# EAGLE board CT_schematic (EAGLE 7.6.0)

Size 100 x 80 mm. Coordinates in mm from the lower left corner, seen from the top.
Outline: 0,0 100,0 100,80 0,80 0,0
Copper layers (1*16): Top 0.035mm / dielectric 1.5mm / Bottom 0.035mm
Design rules "default": minimum track width 10mil, minimum drill 24mil, track to track 8mil, track to pad 8mil, pad to pad 8mil, via to via 8mil, smd to smd 8mil, copper to edge 40mil, drill to drill 8mil, minimum pad ring 10mil, minimum via ring 8mil, stop-mask expansion 4mil, vias tented up to drill 0mil, thermal gap 10mil

## Footprints (pad centres in the part's own frame; a part is rotated, then mirrored left to right if it is on the bottom)
C0603 = smd 0.8 x 0.8: 1 -0.762,0; 2 0.762,0
C0402 = smd 0.5 x 0.5: 1 -0.508,0; 2 0.508,0
C0805 = smd 1.2 x 1.3: 1 -1.016,0; 2 1.016,0
C1210 = smd 1.2 x 2.5: 1 -1.524,0; 2 1.524,0
2220 = smd 1.85 x 5.5: 1 -2.55,0; 2 2.55,0
R0603 = smd 0.8 x 0.8: 1 -0.762,0; 2 0.762,0
EXV-9H = smd 3.505 x 1.676: 1 -2.857,0; 2 2.857,0
L0603 = smd 0.8 x 0.8: 1 -0.762,0; 2 0.762,0
DR1040 = smd 1.6 x 3.2: 1 -4.458,0; 2 4.458,0
PJ-037B_PACKAGE = drill 3.7 square: 1 12,0 | drill 3.2 square: 2 6,0
TFBGA216 = smd 0.4 x 0.4: A1 -5.6,5.6; A2 -4.8,5.6; A3 -4,5.6; A4 -3.2,5.6; A5 -2.4,5.6; A6 -1.6,5.6; A7 -0.8,5.6; A8 0,5.6; A9 0.8,5.6; A10 1.6,5.6; A11 2.4,5.6; A12 3.2,5.6; A13 4,5.6; A14 4.8,5.6; A15 5.6,5.6; B1 -5.6,4.8; B2 -4.8,4.8; B3 -4,4.8; B4 -3.2,4.8; B5 -2.4,4.8; B6 -1.6,4.8; B7 -0.8,4.8; B8 0,4.8; B9 0.8,4.8; B10 1.6,4.8; B11 2.4,4.8; B12 3.2,4.8; B13 4,4.8; B14 4.8,4.8; B15 5.6,4.8; C1 -5.6,4; C2 -4.8,4; C3 -4,4; C4 -3.2,4; C5 -2.4,4; C6 -1.6,4; C7 -0.8,4; C8 0,4; C9 0.8,4; C10 1.6,4; C11 2.4,4; C12 3.2,4; C13 4,4; C14 4.8,4; C15 5.6,4; D1 -5.6,3.2; D2 -4.8,3.2; D3 -4,3.2; D4 -3.2,3.2; D5 -2.4,3.2; D6 -1.6,3.2; D7 -0.8,3.2; D8 0,3.2; D9 0.8,3.2; D10 1.6,3.2; D11 2.4,3.2; D12 3.2,3.2; D13 4,3.2; D14 4.8,3.2; D15 5.6,3.2; E1 -5.6,2.4; E2 -4.8,2.4; E3 -4,2.4; E4 -3.2,2.4; E5 -2.4,2.4; E6 -1.6,2.4; E7 -0.8,2.4; E8 0,2.4; E9 0.8,2.4; E10 1.6,2.4; E11 2.4,2.4; E12 3.2,2.4; E13 4,2.4; E14 4.8,2.4; E15 5.6,2.4; F1 -5.6,1.6; F2 -4.8,1.6; F3 -4,1.6; F4 -3.2,1.6; F5 -2.4,1.6; F6 -1.6,1.6; F7 -0.8,1.6; F8 0,1.6; F9 0.8,1.6; F10 1.6,1.6; F11 2.4,1.6; F12 3.2,1.6; F13 4,1.6; F14 4.8,1.6; F15 5.6,1.6; G1 -5.6,0.8; G2 -4.8,0.8; G3 -4,0.8; G4 -3.2,0.8; G5 -2.4,0.8; G6 -1.6,0.8; G10 1.6,0.8; G11 2.4,0.8; G12 3.2,0.8; G13 4,0.8; G14 4.8,0.8; G15 5.6,0.8; H1 -5.6,0; H2 -4.8,0; H3 -4,0; H4 -3.2,0; H5 -2.4,0; H6 -1.6,0; H10 1.6,0; H11 2.4,0; H12 3.2,0; H13 4,0; H14 4.8,0; H15 5.6,0; J1 -5.6,-0.8; J2 -4.8,-0.8; J3 -4,-0.8; J4 -3.2,-0.8; J5 -2.4,-0.8; J6 -1.6,-0.8; J10 1.6,-0.8; J11 2.4,-0.8; J12 3.2,-0.8; J13 4,-0.8; J14 4.8,-0.8; J15 5.6,-0.8; K1 -5.6,-1.6; K2 -4.8,-1.6; K3 -4,-1.6; K4 -3.2,-1.6; K5 -2.4,-1.6; K6 -1.6,-1.6; K7 -0.8,-1.6; K8 0,-1.6; K9 0.8,-1.6; K10 1.6,-1.6; K11 2.4,-1.6; K12 3.2,-1.6; K13 4,-1.6; K14 4.8,-1.6; K15 5.6,-1.6; L1 -5.6,-2.4; L2 -4.8,-2.4; L3 -4,-2.4; L4 -3.2,-2.4; L5 -2.4,-2.4; L6 -1.6,-2.4; L7 -0.8,-2.4; L8 0,-2.4; L9 0.8,-2.4; L10 1.6,-2.4; L11 2.4,-2.4; L12 3.2,-2.4; L13 4,-2.4; L14 4.8,-2.4; L15 5.6,-2.4; M1 -5.6,-3.2; M2 -4.8,-3.2; M3 -4,-3.2; M4 -3.2,-3.2; M5 -2.4,-3.2; M6 -1.6,-3.2; M7 -0.8,-3.2; M8 0,-3.2; M9 0.8,-3.2; M10 1.6,-3.2; M11 2.4,-3.2; M12 3.2,-3.2; M13 4,-3.2; M14 4.8,-3.2; M15 5.6,-3.2; N1 -5.6,-4; N2 -4.8,-4; N3 -4,-4; N4 -3.2,-4; N5 -2.4,-4; N6 -1.6,-4; N7 -0.8,-4; N8 0,-4; N9 0.8,-4; N10 1.6,-4; N11 2.4,-4; N12 3.2,-4; N13 4,-4; N14 4.8,-4; N15 5.6,-4; P1 -5.6,-4.8; P2 -4.8,-4.8; P3 -4,-4.8; P4 -3.2,-4.8; P5 -2.4,-4.8; P6 -1.6,-4.8; P7 -0.8,-4.8; P8 0,-4.8; P9 0.8,-4.8; P10 1.6,-4.8; P11 2.4,-4.8; P12 3.2,-4.8; P13 4,-4.8; P14 4.8,-4.8; P15 5.6,-4.8; R1 -5.6,-5.6; R2 -4.8,-5.6; R3 -4,-5.6; R4 -3.2,-5.6; R5 -2.4,-5.6; R6 -1.6,-5.6; R7 -0.8,-5.6; R8 0,-5.6; R9 0.8,-5.6; R10 1.6,-5.6; R11 2.4,-5.6; R12 3.2,-5.6; R13 4,-5.6; R14 4.8,-5.6; R15 5.6,-5.6
SOIC-8 = smd 1.6 x 0.6: 1 -2.7,1.905 | smd 1.55 x 0.6: 2 -2.7,0.635; 3 -2.7,-0.635; 4 -2.7,-1.905; 5 2.7,-1.905; 6 2.7,-0.635; 7 2.7,0.635; 8 2.7,1.905
SAMTEC_FTSH-105-01-L-DV-K = smd 0.762 x 2.794: 1 -2.54,-2.032; 2 -2.54,2.032; 3 -1.27,-2.032; 4 -1.27,2.032; 5 0,-2.032; 6 0,2.032; 7 1.27,-2.032; 8 1.27,2.032; 9 2.54,-2.032; 10 2.54,2.032
LH430WV2-SD01 = smd 0.23 x 0.7: 1 0,0; 2 -0.4,0; 3 -0.8,0; 4 -1.2,0; 5 -1.6,0; 6 -2,0; 7 -2.4,0; 8 -2.8,0; 9 -3.2,0; 10 -3.6,0; 11 -4,0; 12 -4.4,0; 13 -4.8,0; 14 -5.2,0; 15 -5.6,0; 16 -5.6,-2.15; 17 -5.2,-2.15; 18 -4.8,-2.15; 19 -4.4,-2.15; 20 -4,-2.15; 21 -3.6,-2.15; 22 -3.2,-2.15; 23 -2.8,-2.15; 24 -2.4,-2.15; 25 -2,-2.15; 26 -1.6,-2.15; 27 -1.2,-2.15; 28 -0.8,-2.15; 29 -0.4,-2.15; 30 0,-2.15
TFBGA-153 = smd 0.3 x 0.3: A1 -3.25,3.25; A2 -2.75,3.25; A3 -2.25,3.25; A4 -1.75,3.25; A5 -1.25,3.25; A6 -0.75,3.25; A7 -0.25,3.25; A8 0.25,3.25; A9 0.75,3.25; A10 1.25,3.25; A11 1.75,3.25; A12 2.25,3.25; A13 2.75,3.25; A14 3.25,3.25; B1 -3.25,2.75; B2 -2.75,2.75; B3 -2.25,2.75; B4 -1.75,2.75; B5 -1.25,2.75; B6 -0.75,2.75; B7 -0.25,2.75; B8 0.25,2.75; B9 0.75,2.75; B10 1.25,2.75; B11 1.75,2.75; B12 2.25,2.75; B13 2.75,2.75; B14 3.25,2.75; C1 -3.25,2.25; C2 -2.75,2.25; C3 -2.25,2.25; C4 -1.75,2.25; C5 -1.25,2.25; C6 -0.75,2.25; C7 -0.25,2.25; C8 0.25,2.25; C9 0.75,2.25; C10 1.25,2.25; C11 1.75,2.25; C12 2.25,2.25; C13 2.75,2.25; C14 3.25,2.25; D1 -3.25,1.75; D2 -2.75,1.75; D3 -2.25,1.75; D4 -1.75,1.75; D12 2.25,1.75; D13 2.75,1.75; D14 3.25,1.75; E1 -3.25,1.25; E2 -2.75,1.25; E3 -2.25,1.25; E5 -1.25,1.25; E6 -0.75,1.25; E7 -0.25,1.25; E8 0.25,1.25; E9 0.75,1.25; E10 1.25,1.25; E12 2.25,1.25; E13 2.75,1.25; E14 3.25,1.25; F1 -3.25,0.75; F2 -2.75,0.75; F3 -2.25,0.75; F5 -1.25,0.75; F10 1.25,0.75; F12 2.25,0.75; F13 2.75,0.75; F14 3.25,0.75; G1 -3.25,0.25; G2 -2.75,0.25; G3 -2.25,0.25; G5 -1.25,0.25; G10 1.25,0.25; G12 2.25,0.25; G13 2.75,0.25; G14 3.25,0.25; H1 -3.25,-0.25; H2 -2.75,-0.25; H3 -2.25,-0.25; H5 -1.25,-0.25; H10 1.25,-0.25; H12 2.25,-0.25; H13 2.75,-0.25; H14 3.25,-0.25; J1 -3.25,-0.75; J2 -2.75,-0.75; J3 -2.25,-0.75; J5 -1.25,-0.75; J10 1.25,-0.75; J12 2.25,-0.75; J13 2.75,-0.75; J14 3.25,-0.75; K1 -3.25,-1.25; K2 -2.75,-1.25; K3 -2.25,-1.25; K5 -1.25,-1.25; K6 -0.75,-1.25; K7 -0.25,-1.25; K8 0.25,-1.25; K9 0.75,-1.25; K10 1.25,-1.25; K12 2.25,-1.25; K13 2.75,-1.25; K14 3.25,-1.25; L1 -3.25,-1.75; L2 -2.75,-1.75; L3 -2.25,-1.75; L12 2.25,-1.75; L13 2.75,-1.75; L14 3.25,-1.75; M1 -3.25,-2.25; M2 -2.75,-2.25; M3 -2.25,-2.25; M4 -1.75,-2.25; M5 -1.25,-2.25; M6 -0.75,-2.25; M7 -0.25,-2.25; M8 0.25,-2.25; M9 0.75,-2.25; M10 1.25,-2.25; M11 1.75,-2.25; M12 2.25,-2.25; M13 2.75,-2.25; M14 3.25,-2.25; N1 -3.25,-2.75; N2 -2.75,-2.75; N3 -2.25,-2.75; N4 -1.75,-2.75; N5 -1.25,-2.75; N6 -0.75,-2.75; N7 -0.25,-2.75; N8 0.25,-2.75; N9 0.75,-2.75; N10 1.25,-2.75; N11 1.75,-2.75; N12 2.25,-2.75; N13 2.75,-2.75; N14 3.25,-2.75; P1 -3.25,-3.25; P2 -2.75,-3.25; P3 -2.25,-3.25; P4 -1.75,-3.25; P5 -1.25,-3.25; P6 -0.75,-3.25; P7 -0.25,-3.25; P8 0.25,-3.25; P9 0.75,-3.25; P10 1.25,-3.25; P11 1.75,-3.25; P12 2.25,-3.25; P13 2.75,-3.25; P14 3.25,-3.25
TH58NVG3S0HBAI4 = smd 0.46 x 0.46: A1 -5.6,2.4; A2 -5.6,1.6; A9 -5.6,-5.6; A10 -5.6,-6.4; B1 -4.8,2.4; B9 -4.8,-5.6; B10 -4.8,-6.4; C3 -4,0.8; C4 -3.2,0.8; C5 -2.4,0.8; C6 -1.6,0.8; C7 -0.8,0.8; C8 0,0.8; D3 -4,0; D4 -3.2,0; D5 -2.4,0; D6 -1.6,0; D7 -0.8,0; D8 0,0; E3 -4,-0.8; E4 -3.2,-0.8; E5 -2.4,-0.8; E6 -1.6,-0.8; E7 -0.8,-0.8; E8 0,-0.8; F3 -4,-1.6; F4 -3.2,-1.6; F5 -2.4,-1.6; F6 -1.6,-1.6; F7 -0.8,-1.6; F8 0,-1.6; G3 -4,-2.4; G4 -3.2,-2.4; G5 -2.4,-2.4; G6 -1.6,-2.4; G7 -0.8,-2.4; G8 0,-2.4; H3 -4,-3.2; H4 -3.2,-3.2; H5 -2.4,-3.2; H6 -1.6,-3.2; H7 -0.8,-3.2; H8 0,-3.2; J3 -4,-4; J4 -3.2,-4; J5 -2.4,-4; J6 -1.6,-4; J7 -0.8,-4; J8 0,-4; K3 -4,-4.8; K4 -3.2,-4.8; K5 -2.4,-4.8; K6 -1.6,-4.8; K7 -0.8,-4.8; K8 0,-4.8; L1 0.8,2.4; L2 0.8,1.6; L9 0.8,-5.6; L10 0.8,-6.4; M1 1.6,2.4; M2 1.6,1.6; M9 1.6,-5.6; M10 1.6,-6.4
ASEK = smd 1.4 x 1: 1 -1.1,-0.8; 2 1.1,-0.8; 3 1.1,0.8; 4 -1.1,0.8
ASFL1 = smd 1.7 x 1.5: 1 -1.27,-1.1; 2 1.27,-1.1; 3 1.27,1.1; 4 -1.27,1.1
SOIC-8_EP = smd 1.6 x 0.533: 1 -2.921,1.905; 2 -2.921,0.635; 3 -2.921,-0.635; 4 -2.921,-1.905; 5 2.921,-1.905; 6 2.921,-0.635; 7 2.921,0.635; 8 2.921,1.905 | smd 2.54 x 3.302: EPAD 0,0 | drill 0.406 pad 0.406: P$1 -0.508,0.635; P$2 0.381,0.635; P$3 -0.508,-0.635; P$4 0.381,-0.635
WSON-8 = smd 0.3 x 0.6: 1 -0.75,0; 2 0.05,0; 3 0.85,0; 4 1.65,0; 5 1.65,3.8; 6 0.85,3.8; 7 0.05,3.8; 8 -0.75,3.8 | smd 3 x 2.6: PAD 0.45,1.9
QFN-16_EP = smd 0.805 x 0.3: 1 -1.452,0.75; 2 -1.452,0.25; 3 -1.452,-0.25; 4 -1.452,-0.75; 9 1.452,-0.75; 10 1.452,-0.25; 11 1.452,0.25; 12 1.452,0.75 | smd 0.3 x 0.805: 5 -0.75,-1.452; 6 -0.25,-1.452; 7 0.25,-1.452; 8 0.75,-1.452; 13 0.75,1.452; 14 0.25,1.452; 15 -0.25,1.452; 16 -0.75,1.452 | smd 1.55 x 1.55: 17 0,0
SON-6 = smd 0.55 x 0.3: 1 -0.355,0.5 | smd 0.52 x 0.3: 2 -0.37,0; 3 -0.37,-0.5; 4 0.37,-0.5; 5 0.37,0; 6 0.37,0.5
SW_4-1437565-2 = smd 1.4 x 2.1: 1 -2.23,4.55; 2 -2.23,-4.55; 3 2.23,4.55; 4 2.23,-4.55
LGM67K-G1J2-24-Z = smd 0.8 x 1.4: A -2,0; C 0,0
NC7SZ125M5X = smd 1.3 x 0.7: 1 -1.3,0.95; 2 -1.3,0; 3 -1.3,-0.95; 4 1.3,-0.95; 5 1.3,0.95

## Placement (x,y rotation side)
C1  1e-06  [C0603]  -22.86,76.2 0 top  (outside the outline)
C2  1e-07  [C0603]  -26.67,76.2 0 top  (outside the outline)
C3  1e-07  [C0603]  -30.48,76.2 0 top  (outside the outline)
C4  1e-07  [C0603]  -34.29,76.2 0 top  (outside the outline)
C5  1e-07  [C0603]  -38.1,76.2 0 top  (outside the outline)
C6  1e-07  [C0603]  -41.91,76.2 0 top  (outside the outline)
C7  1e-07  [C0603]  -45.72,76.2 0 top  (outside the outline)
C8  1e-07  [C0603]  -49.53,76.2 0 top  (outside the outline)
C9  1e-07  [C0603]  -53.34,76.2 0 top  (outside the outline)
C10  1e-07  [C0603]  -57.15,76.2 0 top  (outside the outline)
C11  1e-07  [C0603]  -60.96,76.2 0 top  (outside the outline)
C12  1e-07  [C0603]  -64.77,76.2 0 top  (outside the outline)
C13  1e-07  [C0603]  -68.58,76.2 0 top  (outside the outline)
C14  1e-07  [C0603]  -72.39,76.2 0 top  (outside the outline)
C15  1e-07  [C0603]  -76.2,76.2 0 top  (outside the outline)
C16  1e-07  [C0603]  -80.01,76.2 0 top  (outside the outline)
C17  1e-07  [C0603]  -83.82,76.2 0 top  (outside the outline)
C18  1e-07  [C0603]  -15.24,81.28 0 top  (outside the outline)
C19  1e-07  [C0603]  -19.05,81.28 0 top  (outside the outline)
C20  1e-07  [C0603]  -22.86,81.28 0 top  (outside the outline)
C21  1e-07  [C0603]  -26.67,81.28 0 top  (outside the outline)
C22  4.7e-06  [C0603]  -69.85,71.12 0 top  (outside the outline)
C23  1e-07  [C0603]  -30.48,81.28 0 top  (outside the outline)
C24  1e-08  [C0603]  -34.29,81.28 0 top  (outside the outline)
C25  1e-06  [C0603]  -38.1,81.28 0 top  (outside the outline)
C26  1e-07  [C0603]  -41.91,81.28 0 top  (outside the outline)
C27  2.2e-06  [C0603]  -73.66,71.12 0 top  (outside the outline)
C28  2.2e-06  [C0603]  -77.47,71.12 0 top  (outside the outline)
C29  2.2e-06  [C0603]  -81.28,71.12 0 top  (outside the outline)
C30  1e-08  [C0402]  -46.99,86.36 0 top  (outside the outline)
C31  1e-07  [C0402]  -50.8,86.36 0 top  (outside the outline)
C32  1e-07  [C0402]  -54.61,86.36 0 top  (outside the outline)
C33  1e-07  [C0402]  -58.42,86.36 0 top  (outside the outline)
C34  1e-07  [C0402]  -62.23,86.36 0 top  (outside the outline)
C35  1e-07  [C0402]  -66.04,86.36 0 top  (outside the outline)
C36  1e-07  [C0402]  -69.85,86.36 0 top  (outside the outline)
C37  1e-07  [C0402]  -73.66,86.36 0 top  (outside the outline)
C38  2.2e-06  [C0603]  -85.09,71.12 0 top  (outside the outline)
C39  2.2e-06  [C0603]  -15.24,76.2 0 top  (outside the outline)
C40  1e-07  [C0402]  -77.47,86.36 0 top  (outside the outline)
C41  1e-07  [C0402]  -81.28,86.36 0 top  (outside the outline)
C42  2.2e-06  [C0603]  -19.05,76.2 0 top  (outside the outline)
C43  1e-05  [C0805]  -21.59,60.96 0 top  (outside the outline)
C44  1e-07  [C0402]  -85.09,86.36 0 top  (outside the outline)
C45  1e-07  [C0402]  -15.24,91.44 0 top  (outside the outline)
C46  1e-08  [C0402]  -19.05,91.44 0 top  (outside the outline)
C47  1e-08  [C0402]  -22.86,91.44 0 top  (outside the outline)
C48  1e-05  [C1210]  -29.21,54.61 0 top  (outside the outline)
C49  1e-05  [C1210]  -35.56,54.61 0 top  (outside the outline)
C50  1e-05  [C1210]  -41.91,54.61 0 top  (outside the outline)
C51  1e-05  [C1210]  -48.26,54.61 0 top  (outside the outline)
C52  1e-08  [C0402]  -26.67,91.44 0 top  (outside the outline)
C53  1e-05  [C1210]  -54.61,54.61 0 top  (outside the outline)
C54  1e-05  [C1210]  -60.96,54.61 0 top  (outside the outline)
C55  1e-05  [C0805]  -26.67,60.96 0 top  (outside the outline)
C56  1e-06  [C0603]  -45.72,81.28 0 top  (outside the outline)
C57  1e-07  [C0402]  -30.48,91.44 0 top  (outside the outline)
C58  6.8e-05  [2220]  -33.02,36.83 0 top  (outside the outline)
C59  8e-07  [R0603]  -49.53,81.28 0 top  (outside the outline)
C60  8e-06  [R0603]  -53.34,81.28 0 top  (outside the outline)
C61  1e-07  [C0402]  -34.29,91.44 0 top  (outside the outline)
C62  0.0001  [EXV-9H]  -55.88,45.72 0 top  (outside the outline)
C63  0.0001  [EXV-9H]  -67.31,45.72 0 top  (outside the outline)
C64  1e-08  [C0402]  -38.1,91.44 0 top  (outside the outline)
C65  1e-08  [C0402]  -41.91,91.44 0 top  (outside the outline)
C66  1e-08  [C0402]  -45.72,91.44 0 top  (outside the outline)
C67  1e-08  [C0402]  -49.53,91.44 0 top  (outside the outline)
F1  240.0  [L0603]  -57.15,81.28 0 top  (outside the outline)
I1  5.2e-06  [DR1040]  -72.39,22.86 0 top  (outside the outline)
J1  PJ-037B  [PJ-037B_PACKAGE]  -45.72,25.4 0 top  (outside the outline)
R2  1000.0  [R0603]  -60.96,81.28 0 top  (outside the outline)
R7  4700.0  [R0603]  -64.77,81.28 0 top  (outside the outline)
R8  4700.0  [R0603]  -68.58,81.28 0 top  (outside the outline)
R9  4700.0  [R0603]  -72.39,81.28 0 top  (outside the outline)
R10  2200.0  [R0603]  -76.2,81.28 0 top  (outside the outline)
R11  10000.0  [R0603]  -67.31,60.96 0 top  (outside the outline)
R12  10000.0  [R0603]  -72.39,60.96 0 top  (outside the outline)
R13  10000.0  [R0603]  -77.47,60.96 0 top  (outside the outline)
R14  10000.0  [R0603]  -82.55,60.96 0 top  (outside the outline)
R15  10000.0  [R0603]  -15.24,66.04 0 top  (outside the outline)
R16  10000.0  [R0603]  -20.32,66.04 0 top  (outside the outline)
R17  10000.0  [R0603]  -25.4,66.04 0 top  (outside the outline)
R18  10000.0  [R0603]  -30.48,66.04 0 top  (outside the outline)
R19  10000.0  [R0603]  -35.56,66.04 0 top  (outside the outline)
R20  5.0  [R0603]  -80.01,81.28 0 top  (outside the outline)
R21  10000.0  [R0603]  -40.64,66.04 0 top  (outside the outline)
R22  34000.0  [R0603]  -45.72,66.04 0 top  (outside the outline)
R23  34000.0  [R0603]  -50.8,66.04 0 top  (outside the outline)
R24  34000.0  [R0603]  -55.88,66.04 0 top  (outside the outline)
R25  34000.0  [R0603]  -60.96,66.04 0 top  (outside the outline)
R26  34000.0  [R0603]  -66.04,66.04 0 top  (outside the outline)
R27  34000.0  [R0603]  -71.12,66.04 0 top  (outside the outline)
R28  34000.0  [R0603]  -76.2,66.04 0 top  (outside the outline)
R29  34000.0  [R0603]  -81.28,66.04 0 top  (outside the outline)
R30  34000.0  [R0603]  -15.24,71.12 0 top  (outside the outline)
R31  34000.0  [R0603]  -20.32,71.12 0 top  (outside the outline)
R32  10000.0  [R0603]  -25.4,71.12 0 top  (outside the outline)
R33  10000.0  [R0603]  -30.48,71.12 0 top  (outside the outline)
R34  10000.0  [R0603]  -35.56,71.12 0 top  (outside the outline)
R35  10000.0  [R0603]  -40.64,71.12 0 top  (outside the outline)
R36  10000.0  [R0603]  -45.72,71.12 0 top  (outside the outline)
R37  910.0  [R0603]  -83.82,81.28 0 top  (outside the outline)
R38  2200.0  [R0603]  -15.24,86.36 0 top  (outside the outline)
R39  100000.0  [R0603]  -36.83,60.96 0 top  (outside the outline)
R40  1800.0  [R0603]  -19.05,86.36 0 top  (outside the outline)
R41  1000.0  [R0603]  -22.86,86.36 0 top  (outside the outline)
R42  20000.0  [R0603]  -50.8,71.12 0 top  (outside the outline)
R43  91000.0  [R0603]  -55.88,71.12 0 top  (outside the outline)
R44  300000.0  [R0603]  -41.91,60.96 0 top  (outside the outline)
R45  100000.0  [R0603]  -46.99,60.96 0 top  (outside the outline)
R46  842943.08  [R0603]  -31.75,60.96 0 top  (outside the outline)
R47  100000.0  [R0603]  -52.07,60.96 0 top  (outside the outline)
R48  10000.0  [R0603]  -60.96,71.12 0 top  (outside the outline)
R49  10000.0  [R0603]  -66.04,71.12 0 top  (outside the outline)
R50  9100.0  [R0603]  -26.67,86.36 0 top  (outside the outline)
R51  680000.0  [R0603]  -57.15,60.96 0 top  (outside the outline)
R52  120000.0  [R0603]  -62.23,60.96 0 top  (outside the outline)
U1  STM32F769NGH6  [TFBGA216]  -39.37,8.89 0 top  (outside the outline)
U2  AT25M02-SSHD-T  [SOIC-8]  -24.13,36.83 0 top  (outside the outline)
U3  FTSH-105-01-L-DV-K  [SAMTEC_FTSH-105-01-L-DV-K]  -68.58,7.62 0 top  (outside the outline)
U4  LH430WV2-SD01  [LH430WV2-SD01]  -30.48,87.63 0 top  (outside the outline)
U5  mtfc4gmcdm  [TFBGA-153]  -20.32,8.89 0 top  (outside the outline)
U6  TH58NVG3S0HBAI4  [TH58NVG3S0HBAI4]  -24.13,26.67 0 top  (outside the outline)
U7  ASEK-32.768KHz-ECST  [ASEK]  -46.99,45.72 0 top  (outside the outline)
U8  ASFL1-25MHZ-NCS  [ASFL1]  -26.67,46.99 0 top  (outside the outline)
U9  MIC5234YME  [SOIC-8_EP]  -77.47,44.45 0 top  (outside the outline)
U10  LP3878SDX-ADJ/NOPB  [WSON-8]  -54.61,35.56 0 top  (outside the outline)
U11  LTC3601EUD#PBF  [QFN-16_EP]  -40.64,86.36 0 top  (outside the outline)
U12  LP2951ACSDX/NOPB  [WSON-8]  -72.39,35.56 0 top  (outside the outline)
U13  TPS3895ADRYR  [SON-6]  -52.07,90.17 0 top  (outside the outline)
U14  4-1437565-2  [SW_4-1437565-2]  -62.23,24.13 0 top  (outside the outline)
U15  Q65110A2395  [LGM67K-G1J2-24-Z]  -17.78,54.61 0 top  (outside the outline)
U16  nc7sz125m5x  [NC7SZ125M5X]  -66.04,53.34 0 top  (outside the outline)
U17  nc7sz125m5x  [NC7SZ125M5X]  -72.39,53.34 0 top  (outside the outline)
U18  nc7sz125m5x  [NC7SZ125M5X]  -78.74,53.34 0 top  (outside the outline)
U19  nc7sz125m5x  [NC7SZ125M5X]  -15.24,59.69 0 top  (outside the outline)

## Library data of the parts
C1-C67 F1 I1 J1 R2 R7-R52 U1-U19 = circuit_tree

## Nets
CLK_U1_E1: U1.E1 U7.3
CLK_U1_G1: U1.G1 U8.3
GND: C1.2 C2.2 C3.2 C4.2 C5.2 C6.2 C7.2 C8.2 C9.2 C10.2 C11.2 C12.2 C13.2 C14.2 C15.2 C16.2 C17.2 C18.2 C19.2 C20.2 C21.2 C22.2 C23.2 C24.2 C25.2 C26.2 C27.2 C28.2 C29.2 C30.2 C31.2 C32.2 C33.2 C34.2 C35.2 C36.2 C37.2 C38.2 C39.2 C40.2 C41.2 C42.2 C43.2 C44.2 C45.2 C46.2 C47.2 C48.2 C49.2 C50.2 C51.2 C52.2 C53.2 C54.2 C55.2 C56.2 C58.1 C58.2 C59.2 C60.2 C61.2 C62.2 C63.2 C64.2 C65.2 C66.2 C67.2 J1.2 R2.2 R11.2 R13.2 R20.2 R21.2 R38.2 R41.2 R42.2 R44.2 R47.2 R50.2 R52.2 U1.F2 U1.F6 U1.F7 U1.F8 U1.F9 U1.F10 U1.G6 U1.G10 U1.G12 U1.H6 U1.H10 U1.J6 U1.J10 U1.K6 U1.K7 U1.K8 U1.K9 U1.K10 U1.L6 U1.M1 U1.N1 U2.4 U3.3 U3.5 U4.1 U4.6 U4.9 U4.12 U4.15 U4.17 U4.18 U4.19 U4.24 U4.27 U5.C4 U5.E7 U5.G5 U5.H10 U5.K8 U5.N2 U5.N5 U5.P4 U5.P6 U6.C5 U6.K3 U6.K8 U7.2 U8.2 U9.7 U9.EPAD U10.3 U10.PAD U11.1 U11.9 U11.17 U12.3 U12.4 U12.PAD U13.2 U15.C U16.2 U16.3 U17.1 U17.3 U18.1 U18.3 U19.1 U19.3
NET_U1_E5: R12.1 U1.E5
NET_U1_E6: R11.1 U1.E6
NET_U1_E11: C29.1 U1.E11
NET_U1_G13: C27.1 U1.G13 U1.K12
NET_U1_J1: R9.1 U1.J1 U19.4
NET_U1_L5: R13.1 U1.L5
NET_U1_L11: C28.1 U1.L11
NET_U1_R1: C24.1 C25.1 F1.1 U1.P1 U1.R1
NET_U1_R14: U15.A
NET_U1_R15: U14.3 U14.4
NET_U2_3: R14.1 U2.3
NET_U2_7: R16.1 U2.7
NET_U3_9: R20.1 U3.9
NET_U4_4: R7.1 U4.4 U17.4
NET_U4_5: R10.1
NET_U4_20: R21.1 U4.20
NET_U5_C2: C39.1 C40.1 U5.C2
NET_U5_K5: R8.1 U5.K5 U18.4
NET_U6_C3: R35.1 U6.C3
NET_U9_4: R37.2 R38.1 U9.4
NET_U10_1: C52.1 U10.1
NET_U10_6: R40.2 R41.1 U10.6
NET_U10_8: R39.1 U10.8
NET_U11_3: C57.2 I1.1 U11.3 U11.4
NET_U11_6: C57.1 U11.6
NET_U11_7: C56.1 U11.7 U11.12
NET_U11_10: R44.1 U11.10
NET_U11_11: R42.1 R43.1 U11.11
NET_U11_14: U11.14
NET_U11_ATNET_3: I1.2 R43.2
NET_U12_5: R45.1 U12.5
NET_U12_7: R46.2 R47.1 U12.7
NET_U13_1: R49.1 R50.1 U13.1
NET_U13_3: R51.2 R52.1 U13.3
NET_U13_4: R48.1 U13.4 U16.4 U17.2 U18.2 U19.2
NET_U14_1: R2.1 U14.1 U14.2
PROC_DSIHOST_CKN: U1.H13 U4.13
PROC_DSIHOST_CKP: U1.H12 U4.14
PROC_DSIHOST_D0N: U1.J13 U4.7
PROC_DSIHOST_D0P: U1.J12 U4.8
PROC_DSIHOST_D1N: U1.F13 U4.10
PROC_DSIHOST_D1P: U1.F12 U4.11
PROC_FMC_A16: U1.N10 U6.D5
PROC_FMC_A17: U1.M10 U6.C4
PROC_FMC_D0: U1.L12 U6.H4
PROC_FMC_D1: U1.K13 U6.J4
PROC_FMC_D2: U1.B12 U6.K4
PROC_FMC_D3: U1.C12 U6.K5
PROC_FMC_D4: U1.R8 U6.K6
PROC_FMC_D5: U1.N9 U6.J7
PROC_FMC_D6: U1.P9 U6.K7
PROC_FMC_D7: U1.R9 U6.J8
PROC_FMC_INT: R36.1 U1.J14 U6.C8
PROC_FMC_NCE: R32.1 U1.D9 U6.C6
PROC_FMC_NOE: R33.1 U1.D11 U6.D4
PROC_FMC_NWE: R34.1 U1.C10 U6.C7
PROC_SDMMC1_CK: R31.1 U1.A12 U5.M6
PROC_SDMMC1_CMD: R30.1 U1.D12 U5.M5
PROC_SDMMC1_D0: R22.1 U1.G14 U5.A3
PROC_SDMMC1_D1: R23.1 U1.F14 U5.A4
PROC_SDMMC1_D2: R24.1 U1.B14 U5.A5
PROC_SDMMC1_D3: R25.1 U1.B13 U5.B2
PROC_SDMMC1_D4: R26.1 U1.A7 U5.B3
PROC_SDMMC1_D5: R27.1 U1.B4 U5.B4
PROC_SDMMC1_D6: R28.1 U1.H15 U5.B5
PROC_SDMMC1_D7: R29.1 U1.G15 U5.B6
PROC_SPI1_MISO: U1.A9 U2.2
PROC_SPI1_MOSI: U1.A8 U2.5
PROC_SPI1_NSS: R15.1 U1.A13 U2.1
PROC_SPI1_SCK: U1.B8 U2.6
PROC_SYS_JTCK_SWCLK: R18.1 U1.A14 U3.4
PROC_SYS_JTDO_SWO: U1.A10 U3.6
PROC_SYS_JTMS_SWDIO: R19.1 U1.A15 U3.2
RST_OUT_U3_JTAG_RST_B: R17.1 U3.10 U16.1
VCC_S1_13V7: C48.1 C49.1 C53.1 C55.1 C59.1 C62.1 C63.1 J1.1 R39.2 U9.5 U9.8 U10.4 U11.15 U11.16 U12.8
VCC_TIER1_1V5: C50.1 C51.1 R37.1 U4.29 U9.1
VCC_TIER1_2V8: C34.1 C35.1 C36.1 C54.1 R40.1 U4.16 U4.21 U4.22 U4.23 U10.5
VCC_TIER1_3V3: C1.1 C2.1 C3.1 C4.1 C5.1 C6.1 C7.1 C8.1 C9.1 C10.1 C11.1 C12.1 C13.1 C14.1 C15.1 C16.1 C17.1 C18.1 C19.1 C20.1 C21.1 C22.1 C23.1 C26.1 C30.1 C31.1 C32.1 C37.1 C38.1 C41.1 C42.1 C43.1 C44.1 C45.1 C46.1 C47.1 C58.2 C61.1 C64.1 C65.1 C66.1 C67.1 F1.2 I1.2 R7.2 R8.2 R9.2 R10.2 R12.2 R14.2 R15.2 R16.2 R17.2 R18.2 R19.2 R22.2 R23.2 R24.2 R25.2 R26.2 R27.2 R28.2 R29.2 R30.2 R31.2 R32.2 R33.2 R34.2 R35.2 R36.2 R43.2 R48.2 R49.2 R51.1 U1.C1 U1.E7 U1.E8 U1.E9 U1.E10 U1.F4 U1.F5 U1.F11 U1.G5 U1.G11 U1.H5 U1.H11 U1.J5 U1.J11 U1.K5 U1.K11 U1.L7 U1.L8 U1.L9 U1.L10 U2.8 U3.1 U4.2 U5.C6 U5.E6 U5.F5 U5.J10 U5.K9 U5.M4 U5.N4 U5.P3 U5.P5 U6.H8 U6.J6 U7.4 U8.4 U11.8 U13.6 U16.5 U17.5 U18.5 U19.5
VCC_TIER1_12V0: C33.1 C60.1 R45.2 R46.1 U4.30 U12.1

## Tracks (layer width: path | path; a pad name or v marks a point on that pad's centre or on a via)
CLK_U1_E1  (1 unrouted)
CLK_U1_G1  (1 unrouted)
GND  (147 unrouted)
NET_U1_E5  (1 unrouted)
NET_U1_E6  (1 unrouted)
NET_U1_E11  (1 unrouted)
NET_U1_G13  (2 unrouted)
NET_U1_J1  (2 unrouted)
NET_U1_L5  (1 unrouted)
NET_U1_L11  (1 unrouted)
NET_U1_R1  (4 unrouted)
NET_U1_R15  (1 unrouted)
NET_U2_3  (1 unrouted)
NET_U2_7  (1 unrouted)
NET_U3_9  (1 unrouted)
NET_U4_4  (2 unrouted)
NET_U4_20  (1 unrouted)
NET_U5_C2  (2 unrouted)
NET_U5_K5  (2 unrouted)
NET_U6_C3  (1 unrouted)
NET_U9_4  (2 unrouted)
NET_U10_1  (1 unrouted)
NET_U10_6  (2 unrouted)
NET_U10_8  (1 unrouted)
NET_U11_3  (3 unrouted)
NET_U11_6  (1 unrouted)
NET_U11_7  (2 unrouted)
NET_U11_10  (1 unrouted)
NET_U11_11  (2 unrouted)
NET_U11_ATNET_3  (1 unrouted)
NET_U12_5  (1 unrouted)
NET_U12_7  (2 unrouted)
NET_U13_1  (2 unrouted)
NET_U13_3  (2 unrouted)
NET_U13_4  (5 unrouted)
NET_U14_1  (2 unrouted)
PROC_DSIHOST_CKN  (1 unrouted)
PROC_DSIHOST_CKP  (1 unrouted)
PROC_DSIHOST_D0N  (1 unrouted)
PROC_DSIHOST_D0P  (1 unrouted)
PROC_DSIHOST_D1N  (1 unrouted)
PROC_DSIHOST_D1P  (1 unrouted)
PROC_FMC_A16  (1 unrouted)
PROC_FMC_A17  (1 unrouted)
PROC_FMC_D0  (1 unrouted)
PROC_FMC_D1  (1 unrouted)
PROC_FMC_D2  (1 unrouted)
PROC_FMC_D3  (1 unrouted)
PROC_FMC_D4  (1 unrouted)
PROC_FMC_D5  (1 unrouted)
PROC_FMC_D6  (1 unrouted)
PROC_FMC_D7  (1 unrouted)
PROC_FMC_INT  (2 unrouted)
PROC_FMC_NCE  (2 unrouted)
PROC_FMC_NOE  (2 unrouted)
PROC_FMC_NWE  (2 unrouted)
PROC_SDMMC1_CK  (2 unrouted)
PROC_SDMMC1_CMD  (2 unrouted)
PROC_SDMMC1_D0  (2 unrouted)
PROC_SDMMC1_D1  (2 unrouted)
PROC_SDMMC1_D2  (2 unrouted)
PROC_SDMMC1_D3  (2 unrouted)
PROC_SDMMC1_D4  (2 unrouted)
PROC_SDMMC1_D5  (2 unrouted)
PROC_SDMMC1_D6  (2 unrouted)
PROC_SDMMC1_D7  (2 unrouted)
PROC_SPI1_MISO  (1 unrouted)
PROC_SPI1_MOSI  (1 unrouted)
PROC_SPI1_NSS  (2 unrouted)
PROC_SPI1_SCK  (1 unrouted)
PROC_SYS_JTCK_SWCLK  (2 unrouted)
PROC_SYS_JTDO_SWO  (1 unrouted)
PROC_SYS_JTMS_SWDIO  (2 unrouted)
RST_OUT_U3_JTAG_RST_B  (2 unrouted)
VCC_S1_13V7  (14 unrouted)
VCC_TIER1_1V5  (4 unrouted)
VCC_TIER1_2V8  (9 unrouted)
VCC_TIER1_3V3  (115 unrouted)
VCC_TIER1_12V0  (5 unrouted)